# Altium PCB PCB2.PcbDoc (part 3 of 3)
Units mil, origin at the board's own origin, x right, y up, seen from the top; angles counter-clockwise.
Board outline 6000 x 4000 mil, 2 copper layers (Top Layer, Bottom Layer); 202 components, 201 nets, 407 pads, 100 vias.
Unrouted connection lines stored in the file: 105.
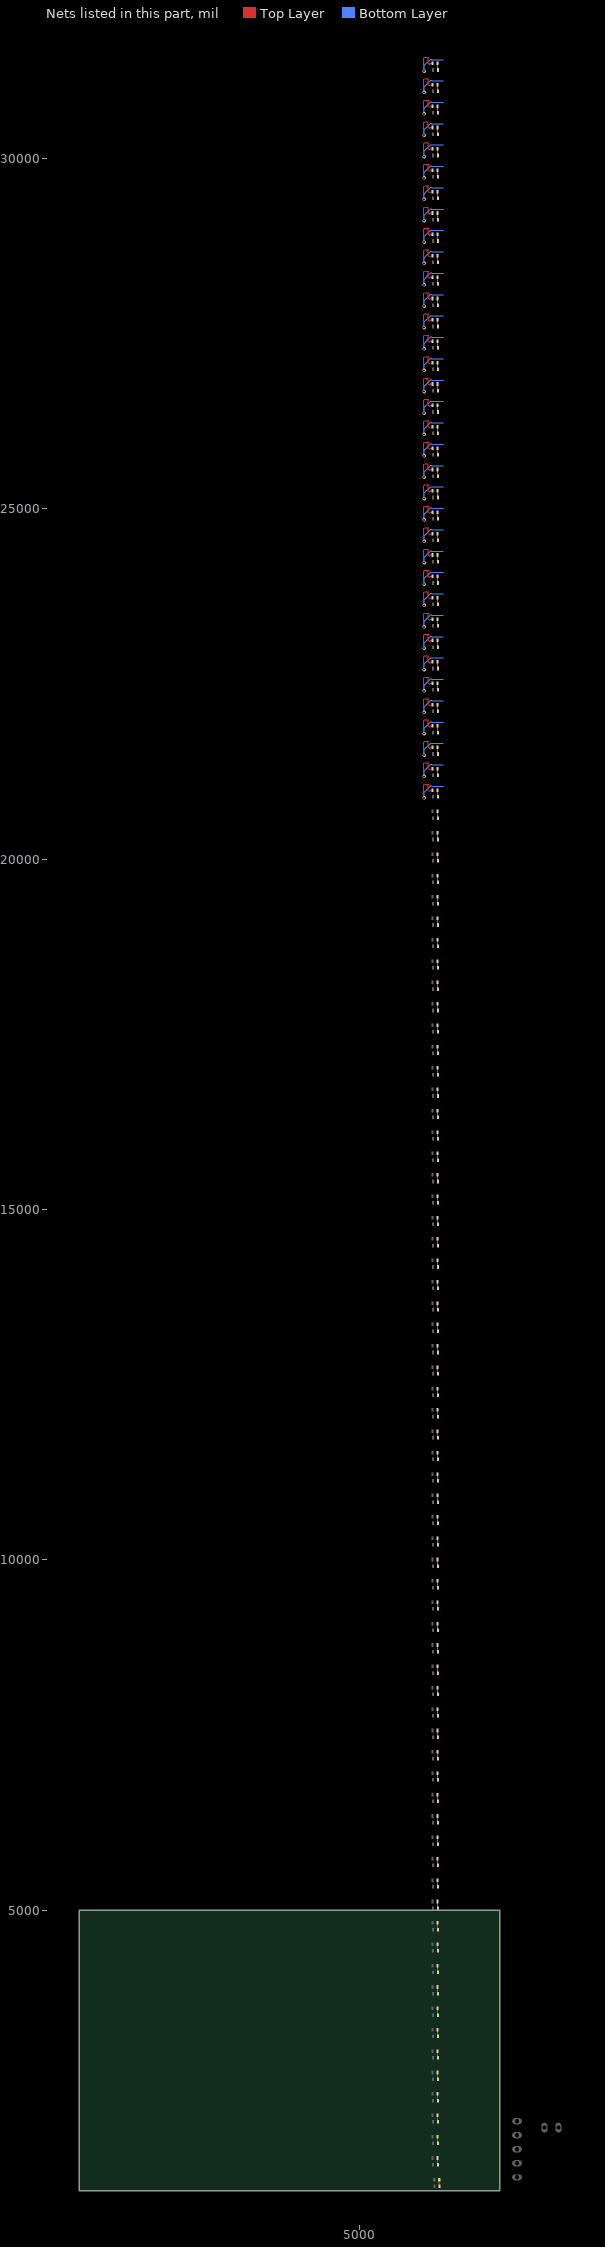
[diagram p3: the nets of this part, all layers, seen from the top]

## Via types
v1: diameter 50, hole 28, Top Layer to Bottom Layer, 100 vias

## Nets (pads, with @x,y where several pads share a name; then routed paths per layer and width w, separated by ;. In a path a pad name is that pad's centre, name@x,y a point inside that pad or via, vN(x,y) a via of type N, cw(c..) or ccw(c..) an arc to the next point about the centre after c; other vN are vias at no path point) (continued)
IN66: R1_Out66.2 | length 801
  Top Layer w10: v1(5920.43,20875) 5915.43,20880 5915.43,21060 5925.43,21070 5974.58,21070 5980.43,21064.14 5980.43,20985 5991.29,20974.14 5999.58,20974.14 6010.43,20985 R1_Out66.2@6039.57,20985
  Bottom Layer w10: v1(5920.43,20875) 5920.43,20955 6011.29,21045.86 6019.58,21045.86 6025.43,21040 6195.43,21040
IN67: R1_Out67.2 | length 801
  Top Layer w10: v1(5920.43,21180) 5915.43,21185 5915.43,21365 5925.43,21375 5974.58,21375 5980.43,21369.14 5980.43,21290 5991.29,21279.14 5999.58,21279.14 6010.43,21290 R1_Out67.2@6039.57,21290
  Bottom Layer w10: v1(5920.43,21180) 5920.43,21260 6011.29,21350.86 6019.58,21350.86 6025.43,21345 6195.43,21345
IN68: R1_Out68.2 | length 801
  Top Layer w10: v1(5920.43,21485) 5915.43,21490 5915.43,21670 5925.43,21680 5974.58,21680 5980.43,21674.14 5980.43,21595 5991.29,21584.14 5999.58,21584.14 6010.43,21595 R1_Out68.2@6039.57,21595
  Bottom Layer w10: v1(5920.43,21485) 5920.43,21565 6011.29,21655.86 6019.58,21655.86 6025.43,21650 6195.43,21650
IN69: R1_Out69.2 | length 801
  Top Layer w10: v1(5920.43,21790) 5915.43,21795 5915.43,21975 5925.43,21985 5974.58,21985 5980.43,21979.14 5980.43,21900 5991.29,21889.14 5999.58,21889.14 6010.43,21900 R1_Out69.2@6039.57,21900
  Bottom Layer w10: v1(5920.43,21790) 5920.43,21870 6011.29,21960.86 6019.58,21960.86 6025.43,21955 6195.43,21955
IN70: R1_Out70.2 | length 801
  Top Layer w10: v1(5920.43,22095) 5915.43,22100 5915.43,22280 5925.43,22290 5974.58,22290 5980.43,22284.14 5980.43,22205 5991.29,22194.14 5999.58,22194.14 6010.43,22205 R1_Out70.2@6039.57,22205
  Bottom Layer w10: v1(5920.43,22095) 5920.43,22175 6011.29,22265.86 6019.58,22265.86 6025.43,22260 6195.43,22260
IN71: R1_Out71.2 | length 801
  Top Layer w10: v1(5920.43,22400) 5915.43,22405 5915.43,22585 5925.43,22595 5974.58,22595 5980.43,22589.14 5980.43,22510 5991.29,22499.14 5999.58,22499.14 6010.43,22510 R1_Out71.2@6039.57,22510
  Bottom Layer w10: v1(5920.43,22400) 5920.43,22480 6011.29,22570.86 6019.58,22570.86 6025.43,22565 6195.43,22565
IN72: R1_Out72.2 | length 801
  Top Layer w10: v1(5920.43,22705) 5915.43,22710 5915.43,22890 5925.43,22900 5974.58,22900 5980.43,22894.14 5980.43,22815 5991.29,22804.14 5999.58,22804.14 6010.43,22815 R1_Out72.2@6039.57,22815
  Bottom Layer w10: v1(5920.43,22705) 5920.43,22785 6011.29,22875.86 6019.58,22875.86 6025.43,22870 6195.43,22870
IN73: R1_Out73.2 | length 801
  Top Layer w10: v1(5920.43,23010) 5915.43,23015 5915.43,23195 5925.43,23205 5974.58,23205 5980.43,23199.14 5980.43,23120 5991.29,23109.14 5999.58,23109.14 6010.43,23120 R1_Out73.2@6039.57,23120
  Bottom Layer w10: v1(5920.43,23010) 5920.43,23090 6011.29,23180.86 6019.58,23180.86 6025.43,23175 6195.43,23175
IN74: R1_Out74.2 | length 801
  Top Layer w10: v1(5920.43,23315) 5915.43,23320 5915.43,23500 5925.43,23510 5974.58,23510 5980.43,23504.14 5980.43,23425 5991.29,23414.14 5999.58,23414.14 6010.43,23425 R1_Out74.2@6039.57,23425
  Bottom Layer w10: v1(5920.43,23315) 5920.43,23395 6011.29,23485.86 6019.58,23485.86 6025.43,23480 6195.43,23480
IN75: R1_Out75.2 | length 801
  Top Layer w10: v1(5920.43,23620) 5915.43,23625 5915.43,23805 5925.43,23815 5974.58,23815 5980.43,23809.14 5980.43,23730 5991.29,23719.14 5999.58,23719.14 6010.43,23730 R1_Out75.2@6039.57,23730
  Bottom Layer w10: v1(5920.43,23620) 5920.43,23700 6011.29,23790.86 6019.58,23790.86 6025.43,23785 6195.43,23785
IN76: R1_Out76.2 | length 801
  Top Layer w10: v1(5920.43,23925) 5915.43,23930 5915.43,24110 5925.43,24120 5974.58,24120 5980.43,24114.14 5980.43,24035 5991.29,24024.14 5999.58,24024.14 6010.43,24035 R1_Out76.2@6039.57,24035
  Bottom Layer w10: v1(5920.43,23925) 5920.43,24005 6011.29,24095.86 6019.58,24095.86 6025.43,24090 6195.43,24090
IN77: R1_Out77.2 | length 801
  Top Layer w10: v1(5920.43,24230) 5915.43,24235 5915.43,24415 5925.43,24425 5974.58,24425 5980.43,24419.14 5980.43,24340 5991.29,24329.14 5999.58,24329.14 6010.43,24340 R1_Out77.2@6039.57,24340
  Bottom Layer w10: v1(5920.43,24230) 5920.43,24310 6011.29,24400.86 6019.58,24400.86 6025.43,24395 6195.43,24395
IN78: R1_Out78.2 | length 801
  Top Layer w10: v1(5920.43,24535) 5915.43,24540 5915.43,24720 5925.43,24730 5974.58,24730 5980.43,24724.14 5980.43,24645 5991.29,24634.14 5999.58,24634.14 6010.43,24645 R1_Out78.2@6039.57,24645
  Bottom Layer w10: v1(5920.43,24535) 5920.43,24615 6011.29,24705.86 6019.58,24705.86 6025.43,24700 6195.43,24700
IN79: R1_Out79.2 | length 801
  Top Layer w10: v1(5920.43,24840) 5915.43,24845 5915.43,25025 5925.43,25035 5974.58,25035 5980.43,25029.14 5980.43,24950 5991.29,24939.14 5999.58,24939.14 6010.43,24950 R1_Out79.2@6039.57,24950
  Bottom Layer w10: v1(5920.43,24840) 5920.43,24920 6011.29,25010.86 6019.58,25010.86 6025.43,25005 6195.43,25005
IN80: R1_Out80.2 | length 801
  Top Layer w10: v1(5920.43,25145) 5915.43,25150 5915.43,25330 5925.43,25340 5974.58,25340 5980.43,25334.14 5980.43,25255 5991.29,25244.14 5999.58,25244.14 6010.43,25255 R1_Out80.2@6039.57,25255
  Bottom Layer w10: v1(5920.43,25145) 5920.43,25225 6011.29,25315.86 6019.58,25315.86 6025.43,25310 6195.43,25310
IN81: R1_Out81.2 | length 801
  Top Layer w10: v1(5920.43,25450) 5915.43,25455 5915.43,25635 5925.43,25645 5974.58,25645 5980.43,25639.14 5980.43,25560 5991.29,25549.14 5999.58,25549.14 6010.43,25560 R1_Out81.2@6039.57,25560
  Bottom Layer w10: v1(5920.43,25450) 5920.43,25530 6011.29,25620.86 6019.58,25620.86 6025.43,25615 6195.43,25615
IN82: R1_Out82.2 | length 801
  Top Layer w10: v1(5920.43,25755) 5915.43,25760 5915.43,25940 5925.43,25950 5974.58,25950 5980.43,25944.14 5980.43,25865 5991.29,25854.14 5999.58,25854.14 6010.43,25865 R1_Out82.2@6039.57,25865
  Bottom Layer w10: v1(5920.43,25755) 5920.43,25835 6011.29,25925.86 6019.58,25925.86 6025.43,25920 6195.43,25920
IN83: R1_Out83.2 | length 801
  Top Layer w10: v1(5920.43,26060) 5915.43,26065 5915.43,26245 5925.43,26255 5974.58,26255 5980.43,26249.14 5980.43,26170 5991.29,26159.14 5999.58,26159.14 6010.43,26170 R1_Out83.2@6039.57,26170
  Bottom Layer w10: v1(5920.43,26060) 5920.43,26140 6011.29,26230.86 6019.58,26230.86 6025.43,26225 6195.43,26225
IN84: R1_Out84.2 | length 801
  Top Layer w10: v1(5920.43,26365) 5915.43,26370 5915.43,26550 5925.43,26560 5974.58,26560 5980.43,26554.14 5980.43,26475 5991.29,26464.14 5999.58,26464.14 6010.43,26475 R1_Out84.2@6039.57,26475
  Bottom Layer w10: v1(5920.43,26365) 5920.43,26445 6011.29,26535.86 6019.58,26535.86 6025.43,26530 6195.43,26530
IN85: R1_Out85.2 | length 801
  Top Layer w10: v1(5920.43,26670) 5915.43,26675 5915.43,26855 5925.43,26865 5974.58,26865 5980.43,26859.14 5980.43,26780 5991.29,26769.14 5999.58,26769.14 6010.43,26780 R1_Out85.2@6039.57,26780
  Bottom Layer w10: v1(5920.43,26670) 5920.43,26750 6011.29,26840.86 6019.58,26840.86 6025.43,26835 6195.43,26835
IN86: R1_Out86.2 | length 801
  Top Layer w10: v1(5920.43,26975) 5915.43,26980 5915.43,27160 5925.43,27170 5974.58,27170 5980.43,27164.14 5980.43,27085 5991.29,27074.14 5999.58,27074.14 6010.43,27085 R1_Out86.2@6039.57,27085
  Bottom Layer w10: v1(5920.43,26975) 5920.43,27055 6011.29,27145.86 6019.58,27145.86 6025.43,27140 6195.43,27140
IN87: R1_Out87.2 | length 801
  Top Layer w10: v1(5920.43,27280) 5915.43,27285 5915.43,27465 5925.43,27475 5974.58,27475 5980.43,27469.14 5980.43,27390 5991.29,27379.14 5999.58,27379.14 6010.43,27390 R1_Out87.2@6039.57,27390
  Bottom Layer w10: v1(5920.43,27280) 5920.43,27360 6011.29,27450.86 6019.58,27450.86 6025.43,27445 6195.43,27445
IN88: R1_Out88.2 | length 801
  Top Layer w10: v1(5920.43,27585) 5915.43,27590 5915.43,27770 5925.43,27780 5974.58,27780 5980.43,27774.14 5980.43,27695 5991.29,27684.14 5999.58,27684.14 6010.43,27695 R1_Out88.2@6039.57,27695
  Bottom Layer w10: v1(5920.43,27585) 5920.43,27665 6011.29,27755.86 6019.58,27755.86 6025.43,27750 6195.43,27750
IN89: R1_Out89.2 | length 801
  Top Layer w10: v1(5920.43,27890) 5915.43,27895 5915.43,28075 5925.43,28085 5974.58,28085 5980.43,28079.14 5980.43,28000 5991.29,27989.14 5999.58,27989.14 6010.43,28000 R1_Out89.2@6039.57,28000
  Bottom Layer w10: v1(5920.43,27890) 5920.43,27970 6011.29,28060.86 6019.58,28060.86 6025.43,28055 6195.43,28055
IN90: R1_Out90.2 | length 801
  Top Layer w10: v1(5920.43,28195) 5915.43,28200 5915.43,28380 5925.43,28390 5974.58,28390 5980.43,28384.14 5980.43,28305 5991.29,28294.14 5999.58,28294.14 6010.43,28305 R1_Out90.2@6039.57,28305
  Bottom Layer w10: v1(5920.43,28195) 5920.43,28275 6011.29,28365.86 6019.58,28365.86 6025.43,28360 6195.43,28360
IN91: R1_Out91.2 | length 801
  Top Layer w10: v1(5920.43,28500) 5915.43,28505 5915.43,28685 5925.43,28695 5974.58,28695 5980.43,28689.14 5980.43,28610 5991.29,28599.14 5999.58,28599.14 6010.43,28610 R1_Out91.2@6039.57,28610
  Bottom Layer w10: v1(5920.43,28500) 5920.43,28580 6011.29,28670.86 6019.58,28670.86 6025.43,28665 6195.43,28665
IN92: R1_Out92.2 | length 801
  Top Layer w10: v1(5920.43,28805) 5915.43,28810 5915.43,28990 5925.43,29000 5974.58,29000 5980.43,28994.14 5980.43,28915 5991.29,28904.14 5999.58,28904.14 6010.43,28915 R1_Out92.2@6039.57,28915
  Bottom Layer w10: v1(5920.43,28805) 5920.43,28885 6011.29,28975.86 6019.58,28975.86 6025.43,28970 6195.43,28970
IN93: R1_Out93.2 | length 801
  Top Layer w10: v1(5920.43,29110) 5915.43,29115 5915.43,29295 5925.43,29305 5974.58,29305 5980.43,29299.14 5980.43,29220 5991.29,29209.14 5999.58,29209.14 6010.43,29220 R1_Out93.2@6039.57,29220
  Bottom Layer w10: v1(5920.43,29110) 5920.43,29190 6011.29,29280.86 6019.58,29280.86 6025.43,29275 6195.43,29275
IN94: R1_Out94.2 | length 801
  Top Layer w10: v1(5920.43,29415) 5915.43,29420 5915.43,29600 5925.43,29610 5974.58,29610 5980.43,29604.14 5980.43,29525 5991.29,29514.14 5999.58,29514.14 6010.43,29525 R1_Out94.2@6039.57,29525
  Bottom Layer w10: v1(5920.43,29415) 5920.43,29495 6011.29,29585.86 6019.58,29585.86 6025.43,29580 6195.43,29580
IN95: R1_Out95.2 | length 801
  Top Layer w10: v1(5920.43,29720) 5915.43,29725 5915.43,29905 5925.43,29915 5974.58,29915 5980.43,29909.14 5980.43,29830 5991.29,29819.14 5999.58,29819.14 6010.43,29830 R1_Out95.2@6039.57,29830
  Bottom Layer w10: v1(5920.43,29720) 5920.43,29800 6011.29,29890.86 6019.58,29890.86 6025.43,29885 6195.43,29885
IN96: R1_Out96.2 | length 801
  Top Layer w10: v1(5920.43,30025) 5915.43,30030 5915.43,30210 5925.43,30220 5974.58,30220 5980.43,30214.14 5980.43,30135 5991.29,30124.14 5999.58,30124.14 6010.43,30135 R1_Out96.2@6039.57,30135
  Bottom Layer w10: v1(5920.43,30025) 5920.43,30105 6011.29,30195.86 6019.58,30195.86 6025.43,30190 6195.43,30190
IN97: R1_Out97.2 | length 801
  Top Layer w10: v1(5920.43,30330) 5915.43,30335 5915.43,30515 5925.43,30525 5974.58,30525 5980.43,30519.14 5980.43,30440 5991.29,30429.14 5999.58,30429.14 6010.43,30440 R1_Out97.2@6039.57,30440
  Bottom Layer w10: v1(5920.43,30330) 5920.43,30410 6011.29,30500.86 6019.58,30500.86 6025.43,30495 6195.43,30495
IN98: R1_Out98.2 | length 801
  Top Layer w10: v1(5920.43,30635) 5915.43,30640 5915.43,30820 5925.43,30830 5974.58,30830 5980.43,30824.14 5980.43,30745 5991.29,30734.14 5999.58,30734.14 6010.43,30745 R1_Out98.2@6039.57,30745
  Bottom Layer w10: v1(5920.43,30635) 5920.43,30715 6011.29,30805.86 6019.58,30805.86 6025.43,30800 6195.43,30800
IN99: R1_Out99.2 | length 801
  Top Layer w10: v1(5920.43,30940) 5915.43,30945 5915.43,31125 5925.43,31135 5974.58,31135 5980.43,31129.14 5980.43,31050 5991.29,31039.14 5999.58,31039.14 6010.43,31050 R1_Out99.2@6039.57,31050
  Bottom Layer w10: v1(5920.43,30940) 5920.43,31020 6011.29,31110.86 6019.58,31110.86 6025.43,31105 6195.43,31105
IN100: R1_Out100.2 | length 801
  Top Layer w10: v1(5920.43,31245) 5915.43,31250 5915.43,31430 5925.43,31440 5974.58,31440 5980.43,31434.14 5980.43,31355 5991.29,31344.14 5999.58,31344.14 6010.43,31355 R1_Out100.2@6039.57,31355
  Bottom Layer w10: v1(5920.43,31245) 5920.43,31325 6011.29,31415.86 6019.58,31415.86 6025.43,31410 6195.43,31410
NetD1_Out1_2: D1_Out1.2 R1_Out1.1 | length 97.1
  Top Layer w10: R1_Out1.1@6135,1155 6137.5,1152.5 6137.5,1062.5 D1_Out1.2@6140,1060
NetD1_Out2_2: D1_Out2.2 R1_Out2.1 | length 97.1
  Top Layer w10: R1_Out2.1@6110.43,1465 6112.93,1462.5 6112.93,1372.5 D1_Out2.2@6115.43,1370
NetD1_Out3_2: D1_Out3.2 R1_Out3.1 | length 97.1
  Top Layer w10: R1_Out3.1@6110.43,1770 6112.93,1767.5 6112.93,1677.5 D1_Out3.2@6115.43,1675
NetD1_Out4_2: D1_Out4.2 R1_Out4.1 | length 97.1
  Top Layer w10: R1_Out4.1@6110.43,2075 6112.93,2072.5 6112.93,1982.5 D1_Out4.2@6115.43,1980
NetD1_Out5_2: D1_Out5.2 R1_Out5.1 | length 97.1
  Top Layer w10: R1_Out5.1@6110.43,2380 6112.93,2377.5 6112.93,2287.5 D1_Out5.2@6115.43,2285
NetD1_Out6_2: D1_Out6.2 R1_Out6.1 | length 97.1
  Top Layer w10: R1_Out6.1@6110.43,2685 6112.93,2682.5 6112.93,2592.5 D1_Out6.2@6115.43,2590
NetD1_Out7_2: D1_Out7.2 R1_Out7.1 | length 97.1
  Top Layer w10: R1_Out7.1@6110.43,2990 6112.93,2987.5 6112.93,2897.5 D1_Out7.2@6115.43,2895
NetD1_Out8_2: D1_Out8.2 R1_Out8.1 | length 97.1
  Top Layer w10: R1_Out8.1@6110.43,3295 6112.93,3292.5 6112.93,3202.5 D1_Out8.2@6115.43,3200
NetD1_Out9_2: D1_Out9.2 R1_Out9.1 | length 97.1
  Top Layer w10: R1_Out9.1@6110.43,3600 6112.93,3597.5 6112.93,3507.5 D1_Out9.2@6115.43,3505
NetD1_Out10_2: D1_Out10.2 R1_Out10.1 | length 97.1
  Top Layer w10: R1_Out10.1@6110.43,3905 6112.93,3902.5 6112.93,3812.5 D1_Out10.2@6115.43,3810
NetD1_Out11_2: D1_Out11.2 R1_Out11.1 | length 97.1
  Top Layer w10: R1_Out11.1@6110.43,4210 6112.93,4207.5 6112.93,4117.5 D1_Out11.2@6115.43,4115
NetD1_Out12_2: D1_Out12.2 R1_Out12.1 | length 97.1
  Top Layer w10: R1_Out12.1@6110.43,4515 6112.93,4512.5 6112.93,4422.5 D1_Out12.2@6115.43,4420
NetD1_Out13_2: D1_Out13.2 R1_Out13.1 | length 97.1
  Top Layer w10: R1_Out13.1@6110.43,4820 6112.93,4817.5 6112.93,4727.5 D1_Out13.2@6115.43,4725
NetD1_Out14_2: D1_Out14.2 R1_Out14.1 | length 97.1
  Top Layer w10: R1_Out14.1@6110.43,5125 6112.93,5122.5 6112.93,5032.5 D1_Out14.2@6115.43,5030
NetD1_Out15_2: D1_Out15.2 R1_Out15.1 | length 97.1
  Top Layer w10: R1_Out15.1@6110.43,5430 6112.93,5427.5 6112.93,5337.5 D1_Out15.2@6115.43,5335
NetD1_Out16_2: D1_Out16.2 R1_Out16.1 | length 97.1
  Top Layer w10: R1_Out16.1@6110.43,5735 6112.93,5732.5 6112.93,5642.5 D1_Out16.2@6115.43,5640
NetD1_Out17_2: D1_Out17.2 R1_Out17.1 | length 97.1
  Top Layer w10: R1_Out17.1@6110.43,6040 6112.93,6037.5 6112.93,5947.5 D1_Out17.2@6115.43,5945
NetD1_Out18_2: D1_Out18.2 R1_Out18.1 | length 97.1
  Top Layer w10: R1_Out18.1@6110.43,6345 6112.93,6342.5 6112.93,6252.5 D1_Out18.2@6115.43,6250
NetD1_Out19_2: D1_Out19.2 R1_Out19.1 | length 97.1
  Top Layer w10: R1_Out19.1@6110.43,6650 6112.93,6647.5 6112.93,6557.5 D1_Out19.2@6115.43,6555
NetD1_Out20_2: D1_Out20.2 R1_Out20.1 | length 97.1
  Top Layer w10: R1_Out20.1@6110.43,6955 6112.93,6952.5 6112.93,6862.5 D1_Out20.2@6115.43,6860
NetD1_Out21_2: D1_Out21.2 R1_Out21.1 | length 97.1
  Top Layer w10: R1_Out21.1@6110.43,7260 6112.93,7257.5 6112.93,7167.5 D1_Out21.2@6115.43,7165
NetD1_Out22_2: D1_Out22.2 R1_Out22.1 | length 97.1
  Top Layer w10: R1_Out22.1@6110.43,7565 6112.93,7562.5 6112.93,7472.5 D1_Out22.2@6115.43,7470
NetD1_Out23_2: D1_Out23.2 R1_Out23.1 | length 97.1
  Top Layer w10: R1_Out23.1@6110.43,7870 6112.93,7867.5 6112.93,7777.5 D1_Out23.2@6115.43,7775
NetD1_Out24_2: D1_Out24.2 R1_Out24.1 | length 97.1
  Top Layer w10: R1_Out24.1@6110.43,8175 6112.93,8172.5 6112.93,8082.5 D1_Out24.2@6115.43,8080
NetD1_Out25_2: D1_Out25.2 R1_Out25.1 | length 97.1
  Top Layer w10: R1_Out25.1@6110.43,8480 6112.93,8477.5 6112.93,8387.5 D1_Out25.2@6115.43,8385
NetD1_Out26_2: D1_Out26.2 R1_Out26.1 | length 97.1
  Top Layer w10: R1_Out26.1@6110.43,8785 6112.93,8782.5 6112.93,8692.5 D1_Out26.2@6115.43,8690
NetD1_Out27_2: D1_Out27.2 R1_Out27.1 | length 97.1
  Top Layer w10: R1_Out27.1@6110.43,9090 6112.93,9087.5 6112.93,8997.5 D1_Out27.2@6115.43,8995
NetD1_Out28_2: D1_Out28.2 R1_Out28.1 | length 97.1
  Top Layer w10: R1_Out28.1@6110.43,9395 6112.93,9392.5 6112.93,9302.5 D1_Out28.2@6115.43,9300
NetD1_Out29_2: D1_Out29.2 R1_Out29.1 | length 97.1
  Top Layer w10: R1_Out29.1@6110.43,9700 6112.93,9697.5 6112.93,9607.5 D1_Out29.2@6115.43,9605
NetD1_Out30_2: D1_Out30.2 R1_Out30.1 | length 97.1
  Top Layer w10: R1_Out30.1@6110.43,10005 6112.93,10002.5 6112.93,9912.5 D1_Out30.2@6115.43,9910
NetD1_Out31_2: D1_Out31.2 R1_Out31.1 | length 97.1
  Top Layer w10: R1_Out31.1@6110.43,10310 6112.93,10307.5 6112.93,10217.5 D1_Out31.2@6115.43,10215
NetD1_Out32_2: D1_Out32.2 R1_Out32.1 | length 97.1
  Top Layer w10: R1_Out32.1@6110.43,10615 6112.93,10612.5 6112.93,10522.5 D1_Out32.2@6115.43,10520
NetD1_Out33_2: D1_Out33.2 R1_Out33.1 | length 97.1
  Top Layer w10: R1_Out33.1@6110.43,10920 6112.93,10917.5 6112.93,10827.5 D1_Out33.2@6115.43,10825
NetD1_Out34_2: D1_Out34.2 R1_Out34.1 | length 97.1
  Top Layer w10: R1_Out34.1@6110.43,11225 6112.93,11222.5 6112.93,11132.5 D1_Out34.2@6115.43,11130
NetD1_Out35_2: D1_Out35.2 R1_Out35.1 | length 97.1
  Top Layer w10: R1_Out35.1@6110.43,11530 6112.93,11527.5 6112.93,11437.5 D1_Out35.2@6115.43,11435
NetD1_Out36_2: D1_Out36.2 R1_Out36.1 | length 97.1
  Top Layer w10: R1_Out36.1@6110.43,11835 6112.93,11832.5 6112.93,11742.5 D1_Out36.2@6115.43,11740
NetD1_Out37_2: D1_Out37.2 R1_Out37.1 | length 97.1
  Top Layer w10: R1_Out37.1@6110.43,12140 6112.93,12137.5 6112.93,12047.5 D1_Out37.2@6115.43,12045
NetD1_Out38_2: D1_Out38.2 R1_Out38.1 | length 97.1
  Top Layer w10: R1_Out38.1@6110.43,12445 6112.93,12442.5 6112.93,12352.5 D1_Out38.2@6115.43,12350
NetD1_Out39_2: D1_Out39.2 R1_Out39.1 | length 97.1
  Top Layer w10: R1_Out39.1@6110.43,12750 6112.93,12747.5 6112.93,12657.5 D1_Out39.2@6115.43,12655
NetD1_Out40_2: D1_Out40.2 R1_Out40.1 | length 97.1
  Top Layer w10: R1_Out40.1@6110.43,13055 6112.93,13052.5 6112.93,12962.5 D1_Out40.2@6115.43,12960
NetD1_Out41_2: D1_Out41.2 R1_Out41.1 | length 97.1
  Top Layer w10: R1_Out41.1@6110.43,13360 6112.93,13357.5 6112.93,13267.5 D1_Out41.2@6115.43,13265
NetD1_Out42_2: D1_Out42.2 R1_Out42.1 | length 97.1
  Top Layer w10: R1_Out42.1@6110.43,13665 6112.93,13662.5 6112.93,13572.5 D1_Out42.2@6115.43,13570
NetD1_Out43_2: D1_Out43.2 R1_Out43.1 | length 97.1
  Top Layer w10: R1_Out43.1@6110.43,13970 6112.93,13967.5 6112.93,13877.5 D1_Out43.2@6115.43,13875
NetD1_Out44_2: D1_Out44.2 R1_Out44.1 | length 97.1
  Top Layer w10: R1_Out44.1@6110.43,14275 6112.93,14272.5 6112.93,14182.5 D1_Out44.2@6115.43,14180
NetD1_Out45_2: D1_Out45.2 R1_Out45.1 | length 97.1
  Top Layer w10: R1_Out45.1@6110.43,14580 6112.93,14577.5 6112.93,14487.5 D1_Out45.2@6115.43,14485
NetD1_Out46_2: D1_Out46.2 R1_Out46.1 | length 97.1
  Top Layer w10: R1_Out46.1@6110.43,14885 6112.93,14882.5 6112.93,14792.5 D1_Out46.2@6115.43,14790
NetD1_Out47_2: D1_Out47.2 R1_Out47.1 | length 97.1
  Top Layer w10: R1_Out47.1@6110.43,15190 6112.93,15187.5 6112.93,15097.5 D1_Out47.2@6115.43,15095
NetD1_Out48_2: D1_Out48.2 R1_Out48.1 | length 97.1
  Top Layer w10: R1_Out48.1@6110.43,15495 6112.93,15492.5 6112.93,15402.5 D1_Out48.2@6115.43,15400
NetD1_Out49_2: D1_Out49.2 R1_Out49.1 | length 97.1
  Top Layer w10: R1_Out49.1@6110.43,15800 6112.93,15797.5 6112.93,15707.5 D1_Out49.2@6115.43,15705
NetD1_Out50_2: D1_Out50.2 R1_Out50.1 | length 97.1
  Top Layer w10: R1_Out50.1@6110.43,16105 6112.93,16102.5 6112.93,16012.5 D1_Out50.2@6115.43,16010
NetD1_Out51_2: D1_Out51.2 R1_Out51.1 | length 97.1
  Top Layer w10: R1_Out51.1@6110.43,16410 6112.93,16407.5 6112.93,16317.5 D1_Out51.2@6115.43,16315
NetD1_Out52_2: D1_Out52.2 R1_Out52.1 | length 97.1
  Top Layer w10: R1_Out52.1@6110.43,16715 6112.93,16712.5 6112.93,16622.5 D1_Out52.2@6115.43,16620
NetD1_Out53_2: D1_Out53.2 R1_Out53.1 | length 97.1
  Top Layer w10: R1_Out53.1@6110.43,17020 6112.93,17017.5 6112.93,16927.5 D1_Out53.2@6115.43,16925
NetD1_Out54_2: D1_Out54.2 R1_Out54.1 | length 97.1
  Top Layer w10: R1_Out54.1@6110.43,17325 6112.93,17322.5 6112.93,17232.5 D1_Out54.2@6115.43,17230
NetD1_Out55_2: D1_Out55.2 R1_Out55.1 | length 97.1
  Top Layer w10: R1_Out55.1@6110.43,17630 6112.93,17627.5 6112.93,17537.5 D1_Out55.2@6115.43,17535
NetD1_Out56_2: D1_Out56.2 R1_Out56.1 | length 97.1
  Top Layer w10: R1_Out56.1@6110.43,17935 6112.93,17932.5 6112.93,17842.5 D1_Out56.2@6115.43,17840
NetD1_Out57_2: D1_Out57.2 R1_Out57.1 | length 97.1
  Top Layer w10: R1_Out57.1@6110.43,18240 6112.93,18237.5 6112.93,18147.5 D1_Out57.2@6115.43,18145
NetD1_Out58_2: D1_Out58.2 R1_Out58.1 | length 97.1
  Top Layer w10: R1_Out58.1@6110.43,18545 6112.93,18542.5 6112.93,18452.5 D1_Out58.2@6115.43,18450
NetD1_Out59_2: D1_Out59.2 R1_Out59.1 | length 97.1
  Top Layer w10: R1_Out59.1@6110.43,18850 6112.93,18847.5 6112.93,18757.5 D1_Out59.2@6115.43,18755
NetD1_Out60_2: D1_Out60.2 R1_Out60.1 | length 97.1
  Top Layer w10: R1_Out60.1@6110.43,19155 6112.93,19152.5 6112.93,19062.5 D1_Out60.2@6115.43,19060
NetD1_Out61_2: D1_Out61.2 R1_Out61.1 | length 97.1
  Top Layer w10: R1_Out61.1@6110.43,19460 6112.93,19457.5 6112.93,19367.5 D1_Out61.2@6115.43,19365
NetD1_Out62_2: D1_Out62.2 R1_Out62.1 | length 97.1
  Top Layer w10: R1_Out62.1@6110.43,19765 6112.93,19762.5 6112.93,19672.5 D1_Out62.2@6115.43,19670
NetD1_Out63_2: D1_Out63.2 R1_Out63.1 | length 97.1
  Top Layer w10: R1_Out63.1@6110.43,20070 6112.93,20067.5 6112.93,19977.5 D1_Out63.2@6115.43,19975
NetD1_Out64_2: D1_Out64.2 R1_Out64.1 | length 97.1
  Top Layer w10: R1_Out64.1@6110.43,20375 6112.93,20372.5 6112.93,20282.5 D1_Out64.2@6115.43,20280
NetD1_Out65_2: D1_Out65.2 R1_Out65.1 | length 97.1
  Top Layer w10: R1_Out65.1@6110.43,20680 6112.93,20677.5 6112.93,20587.5 D1_Out65.2@6115.43,20585
NetD1_Out66_2: D1_Out66.2 R1_Out66.1 | length 97.1
  Top Layer w10: R1_Out66.1@6110.43,20985 6112.93,20982.5 6112.93,20892.5 D1_Out66.2@6115.43,20890
NetD1_Out67_2: D1_Out67.2 R1_Out67.1 | length 97.1
  Top Layer w10: R1_Out67.1@6110.43,21290 6112.93,21287.5 6112.93,21197.5 D1_Out67.2@6115.43,21195
NetD1_Out68_2: D1_Out68.2 R1_Out68.1 | length 97.1
  Top Layer w10: R1_Out68.1@6110.43,21595 6112.93,21592.5 6112.93,21502.5 D1_Out68.2@6115.43,21500
NetD1_Out69_2: D1_Out69.2 R1_Out69.1 | length 97.1
  Top Layer w10: R1_Out69.1@6110.43,21900 6112.93,21897.5 6112.93,21807.5 D1_Out69.2@6115.43,21805
NetD1_Out70_2: D1_Out70.2 R1_Out70.1 | length 97.1
  Top Layer w10: R1_Out70.1@6110.43,22205 6112.93,22202.5 6112.93,22112.5 D1_Out70.2@6115.43,22110
NetD1_Out71_2: D1_Out71.2 R1_Out71.1 | length 97.1
  Top Layer w10: R1_Out71.1@6110.43,22510 6112.93,22507.5 6112.93,22417.5 D1_Out71.2@6115.43,22415
NetD1_Out72_2: D1_Out72.2 R1_Out72.1 | length 97.1
  Top Layer w10: R1_Out72.1@6110.43,22815 6112.93,22812.5 6112.93,22722.5 D1_Out72.2@6115.43,22720
NetD1_Out73_2: D1_Out73.2 R1_Out73.1 | length 97.1
  Top Layer w10: R1_Out73.1@6110.43,23120 6112.93,23117.5 6112.93,23027.5 D1_Out73.2@6115.43,23025
NetD1_Out74_2: D1_Out74.2 R1_Out74.1 | length 97.1
  Top Layer w10: R1_Out74.1@6110.43,23425 6112.93,23422.5 6112.93,23332.5 D1_Out74.2@6115.43,23330
NetD1_Out75_2: D1_Out75.2 R1_Out75.1 | length 97.1
  Top Layer w10: R1_Out75.1@6110.43,23730 6112.93,23727.5 6112.93,23637.5 D1_Out75.2@6115.43,23635
NetD1_Out76_2: D1_Out76.2 R1_Out76.1 | length 97.1
  Top Layer w10: R1_Out76.1@6110.43,24035 6112.93,24032.5 6112.93,23942.5 D1_Out76.2@6115.43,23940
NetD1_Out77_2: D1_Out77.2 R1_Out77.1 | length 97.1
  Top Layer w10: R1_Out77.1@6110.43,24340 6112.93,24337.5 6112.93,24247.5 D1_Out77.2@6115.43,24245
NetD1_Out78_2: D1_Out78.2 R1_Out78.1 | length 97.1
  Top Layer w10: R1_Out78.1@6110.43,24645 6112.93,24642.5 6112.93,24552.5 D1_Out78.2@6115.43,24550
NetD1_Out79_2: D1_Out79.2 R1_Out79.1 | length 97.1
  Top Layer w10: R1_Out79.1@6110.43,24950 6112.93,24947.5 6112.93,24857.5 D1_Out79.2@6115.43,24855
NetD1_Out80_2: D1_Out80.2 R1_Out80.1 | length 97.1
  Top Layer w10: R1_Out80.1@6110.43,25255 6112.93,25252.5 6112.93,25162.5 D1_Out80.2@6115.43,25160
NetD1_Out81_2: D1_Out81.2 R1_Out81.1 | length 97.1
  Top Layer w10: R1_Out81.1@6110.43,25560 6112.93,25557.5 6112.93,25467.5 D1_Out81.2@6115.43,25465
NetD1_Out82_2: D1_Out82.2 R1_Out82.1 | length 97.1
  Top Layer w10: R1_Out82.1@6110.43,25865 6112.93,25862.5 6112.93,25772.5 D1_Out82.2@6115.43,25770
NetD1_Out83_2: D1_Out83.2 R1_Out83.1 | length 97.1
  Top Layer w10: R1_Out83.1@6110.43,26170 6112.93,26167.5 6112.93,26077.5 D1_Out83.2@6115.43,26075
NetD1_Out84_2: D1_Out84.2 R1_Out84.1 | length 97.1
  Top Layer w10: R1_Out84.1@6110.43,26475 6112.93,26472.5 6112.93,26382.5 D1_Out84.2@6115.43,26380
NetD1_Out85_2: D1_Out85.2 R1_Out85.1 | length 97.1
  Top Layer w10: R1_Out85.1@6110.43,26780 6112.93,26777.5 6112.93,26687.5 D1_Out85.2@6115.43,26685
NetD1_Out86_2: D1_Out86.2 R1_Out86.1 | length 97.1
  Top Layer w10: R1_Out86.1@6110.43,27085 6112.93,27082.5 6112.93,26992.5 D1_Out86.2@6115.43,26990
NetD1_Out87_2: D1_Out87.2 R1_Out87.1 | length 97.1
  Top Layer w10: R1_Out87.1@6110.43,27390 6112.93,27387.5 6112.93,27297.5 D1_Out87.2@6115.43,27295
NetD1_Out88_2: D1_Out88.2 R1_Out88.1 | length 97.1
  Top Layer w10: R1_Out88.1@6110.43,27695 6112.93,27692.5 6112.93,27602.5 D1_Out88.2@6115.43,27600
NetD1_Out89_2: D1_Out89.2 R1_Out89.1 | length 97.1
  Top Layer w10: R1_Out89.1@6110.43,28000 6112.93,27997.5 6112.93,27907.5 D1_Out89.2@6115.43,27905
NetD1_Out90_2: D1_Out90.2 R1_Out90.1 | length 97.1
  Top Layer w10: R1_Out90.1@6110.43,28305 6112.93,28302.5 6112.93,28212.5 D1_Out90.2@6115.43,28210
NetD1_Out91_2: D1_Out91.2 R1_Out91.1 | length 97.1
  Top Layer w10: R1_Out91.1@6110.43,28610 6112.93,28607.5 6112.93,28517.5 D1_Out91.2@6115.43,28515
NetD1_Out92_2: D1_Out92.2 R1_Out92.1 | length 97.1
  Top Layer w10: R1_Out92.1@6110.43,28915 6112.93,28912.5 6112.93,28822.5 D1_Out92.2@6115.43,28820
NetD1_Out93_2: D1_Out93.2 R1_Out93.1 | length 97.1
  Top Layer w10: R1_Out93.1@6110.43,29220 6112.93,29217.5 6112.93,29127.5 D1_Out93.2@6115.43,29125
NetD1_Out94_2: D1_Out94.2 R1_Out94.1 | length 97.1
  Top Layer w10: R1_Out94.1@6110.43,29525 6112.93,29522.5 6112.93,29432.5 D1_Out94.2@6115.43,29430
NetD1_Out95_2: D1_Out95.2 R1_Out95.1 | length 97.1
  Top Layer w10: R1_Out95.1@6110.43,29830 6112.93,29827.5 6112.93,29737.5 D1_Out95.2@6115.43,29735
NetD1_Out96_2: D1_Out96.2 R1_Out96.1 | length 97.1
  Top Layer w10: R1_Out96.1@6110.43,30135 6112.93,30132.5 6112.93,30042.5 D1_Out96.2@6115.43,30040
NetD1_Out97_2: D1_Out97.2 R1_Out97.1 | length 97.1
  Top Layer w10: R1_Out97.1@6110.43,30440 6112.93,30437.5 6112.93,30347.5 D1_Out97.2@6115.43,30345
NetD1_Out98_2: D1_Out98.2 R1_Out98.1 | length 97.1
  Top Layer w10: R1_Out98.1@6110.43,30745 6112.93,30742.5 6112.93,30652.5 D1_Out98.2@6115.43,30650
NetD1_Out99_2: D1_Out99.2 R1_Out99.1 | length 97.1
  Top Layer w10: R1_Out99.1@6110.43,31050 6112.93,31047.5 6112.93,30957.5 D1_Out99.2@6115.43,30955
NetD1_Out100_2: D1_Out100.2 R1_Out100.1 | length 97.1
  Top Layer w10: R1_Out100.1@6110.43,31355 6112.93,31352.5 6112.93,31262.5 D1_Out100.2@6115.43,31260
pads on no net: CN?.2

## Text inside footprints (layer, text, board x,y; h text height)
CN1: Top Overlay "1" at 7385,1180 h43.31 r90; Top Overlay "5" at 7385,1980 h43.31 r90
CN?: Top Overlay "1" at 7630,1760 h43.31; Top Overlay "2" at 7820,1760 h43.31